# EAGLE board WWIII (EAGLE 8.4.3)
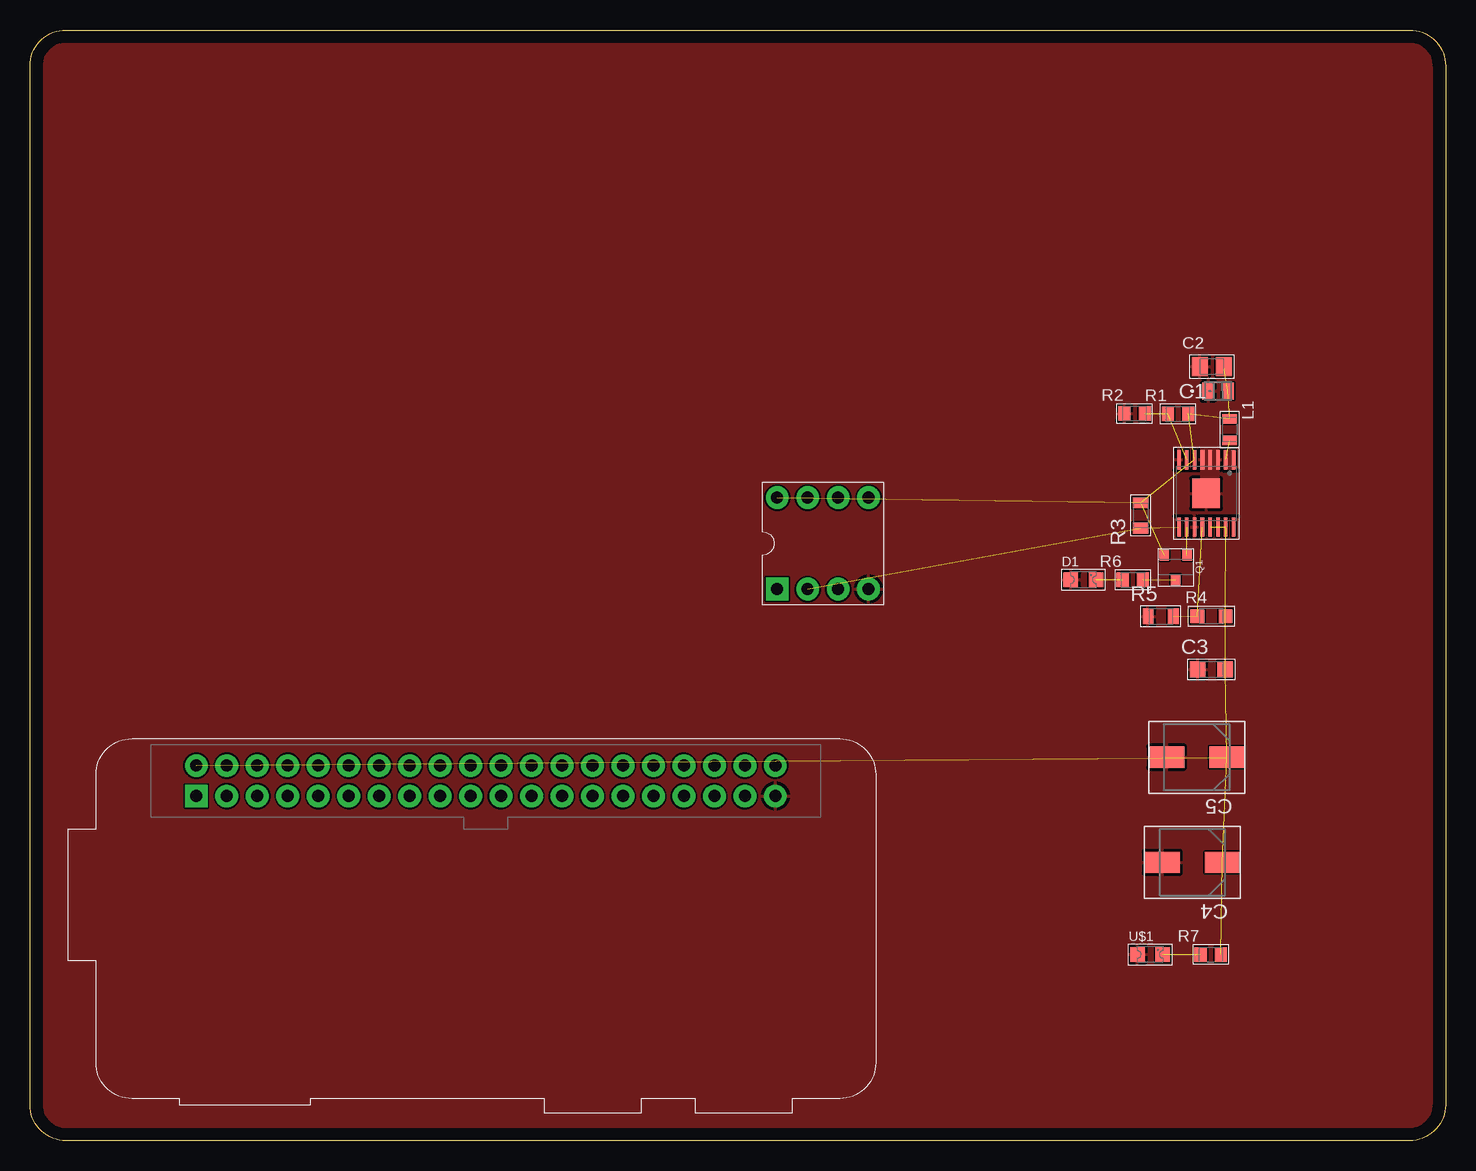
[diagram p0: board, top side]

Size 118 x 92.6 mm. Coordinates in mm from the lower left corner, seen from the top.
Outline: 118,3 arc-90 115,0 3,0 arc-90 0,3 0,89.6 arc-90 3,92.6 115,92.6 arc-90 118,89.6 118,3
Copper layers (1*16): Top 0.035mm / dielectric 1.5mm / Bottom 0.035mm
Design rules "default": minimum track width 6mil, minimum drill 0.35mm, track to track 6mil, track to pad 6mil, pad to pad 6mil, via to via 6mil, smd to smd 6mil, copper to edge 40mil, drill to drill 6mil, minimum pad ring 10mil, minimum via ring 8mil, stop-mask expansion 4mil, vias tented up to drill 0mil, thermal gap 10mil
tRestrict: 4 lines

## Footprints (pad centres in the part's own frame; a part is rotated, then mirrored left to right if it is on the bottom)
0805 = smd 0.965 x 1.448: 1 -0.826,0; 2 0.826,0
KEM_C1006_X5R_SMD = smd 1.35 x 1.55: 1 -1,0; 2 1,0
CAP-X5R = smd 1.3 x 1.3: 1 -1.15,0; 2 1.15,0
CAP_EEE_C = smd 2.921 x 1.778: 1 -2.502,0; 2 2.502,0
OSRAM_CHIPLED = smd 1.2 x 1.2: P$1 1.05,0; P$2 -1.05,0
MLZ2012 = smd 0.8 x 1.2: 1 -0.9,0; 2 0.9,0
SOT23-3 = smd 0.8 x 0.9: 1 -0.95,-1; 2 0.95,-1; 3 0,1.1
RC0805N = smd 1.016 x 1.194: 1 -0.851,0; 2 0.851,0
RESISTOR-0805 = smd 0.9 x 1.3: 1 -1.05,0; 2 1.05,0
PANASONIC-SMD-RESISTOR-0805 = smd 1.15 x 1.15: P$1 -1.175,0; P$2 1.175,0
TPS61030PWPR = smd 0.3 x 1.6: P$1 -2.275,-2.8; P$2 -1.625,-2.8; P$3 -0.975,-2.8; P$4 -0.325,-2.8; P$5 0.325,-2.8; P$6 0.975,-2.8; P$7 1.625,-2.8; P$8 2.275,-2.8; P$9 2.275,2.8; P$10 1.625,2.8; P$11 0.975,2.8; P$12 0.325,2.8; P$13 -0.325,2.8; P$14 -0.975,2.8; P$15 -1.625,2.8; P$16 -2.275,2.8 | smd 2.31 x 2.46: P$PWRPAD 0,0
RASPBERRY-PI = drill 1 pad 1.905 square: P$1 -24.13,-1.27 | drill 1 pad 1.905: P$2 -24.13,1.27; P$3 -21.59,-1.27; P$4 -21.59,1.27; P$5 -19.05,-1.27; P$6 -19.05,1.27; P$7 -16.51,-1.27; P$8 -16.51,1.27; P$9 -13.97,-1.27; P$10 -13.97,1.27; P$11 -11.43,-1.27; P$12 -11.43,1.27; P$13 -8.89,-1.27; P$14 -8.89,1.27; P$15 -6.35,-1.27; P$16 -6.35,1.27; P$17 -3.81,-1.27; P$18 -3.81,1.27; P$19 -1.27,-1.27; P$20 -1.27,1.27; P$21 1.27,-1.27; P$22 1.27,1.27; P$23 3.81,-1.27; P$24 3.81,1.27; P$25 6.35,-1.27; P$26 6.35,1.27; P$27 8.89,-1.27; P$28 8.89,1.27; P$29 11.43,-1.27; P$30 11.43,1.27; P$31 13.97,-1.27; P$32 13.97,1.27; P$33 16.51,-1.27; P$34 16.51,1.27; P$35 19.05,-1.27; P$36 19.05,1.27; P$37 21.59,-1.27; P$38 21.59,1.27; P$39 24.13,-1.27; P$40 24.13,1.27
ATTINY-SOCKETED = drill 1 pad 1.905 square: P$1 -3.81,-3.81 | drill 1 pad 1.905: P$2 -1.27,-3.81; P$3 1.27,-3.81; P$4 3.81,-3.81; P$5 3.81,3.81; P$6 1.27,3.81; P$7 -1.27,3.81; P$8 -3.81,3.81

## Placement (x,y rotation side)
C1  0.1uF  [0805]  99.04,62.5 0 top
C2  10uF  [KEM_C1006_X5R_SMD]  98.53,64.54 0 top
C3  2.2uF  [CAP-X5R]  98.49,39.29 0 top
C4  100uF  [CAP_EEE_C]  96.89,23.2 180 top
C5  100uF  [CAP_EEE_C]  97.26,31.97 180 top
D1  [OSRAM_CHIPLED]  87.81,46.77 0 top
L1  6.8uH  [MLZ2012]  100,59.29 270 top
Q1  [SOT23-3]  95.5,47.84 180 top
R1  1.87M  [RC0805N]  95.7,60.6 0 top
R2  340k  [RC0805N]  92.08,60.63 0 top
R3  200k  [RESISTOR-0805]  92.59,52.14 90 top
R4  1.87M  [PANASONIC-SMD-RESISTOR-0805]  98.49,43.73 0 top
R5  200k  [RESISTOR-0805]  94.25,43.71 0 top
R6  [RC0805N]  91.93,46.77 0 top
R7  [RC0805N]  98.43,15.53 0 top
U1  [TPS61030PWPR]  98.05,53.97 180 top
U2  [RASPBERRY-PI]  38,30 0 top
U3  [ATTINY-SOCKETED]  66.1,49.8 0 top
U$1  OSRAM-GREEN-DIFFUSED-LED  [OSRAM_CHIPLED]  93.38,15.53 0 top

## Library data of the parts
C1 = balogh; MANUFACTURER_PART_NUMBER: 08055C104KAT2A; VENDOR: AVX Corporation
C2 C3 D1 L1 Q1 R3-R5 U1-U3 U$1 = balogh
C4 C5 = balogh; MANUFACTURER_PART_NUMBER: EEE1AA101WR; VENDOR: Panasonic
R1 R2 R6 R7 = balogh; MANUFACTURER_PART_NUMBER: RC0805JR0710KL; VENDOR: Yageo

## Nets
GND: C1.1 C2.1 C3.1 C4.2 C5.2 D1.P$2 R2.1 R5.1 U1.P$3 U1.P$4 U1.P$5 U1.P$8 U1.P$11 U1.P$PWRPAD U2.P$39 U3.P$4 U$1.P$2
N$1: R4.P$1 R5.2 U1.P$12
N$2: L1.2 U1.P$1 U1.P$2
N$3: C3.2 C4.1 C5.1 R4.P$2 R7.2 U1.P$13 U1.P$14 U1.P$15 U2.P$2
N$4: R7.1 U$1.P$1
N$5: R1.1 R2.2 U1.P$7
N$6: Q1.1 U1.P$10
N$7: R3.1 U1.P$9 U3.P$2
N$8: Q1.3 R6.2
N$9: D1.P$1 R6.1
V+: C1.2 C2.2 L1.1 Q1.2 R1.2 R3.2 U1.P$6 U3.P$8

## Tracks (layer width: path | path; a pad name or v marks a point on that pad's centre or on a via)
GND
  pour Top (isolate 0.1): 0,0 118,0 118,93 0,93
  pour Top: 97.54,57.66 99.31,57.66 99.31,55.12 97.54,55.12
  pour Top (no thermals): 97.66,57.91 99.06,57.91 99.06,55.12 97.66,55.12
N$1  (2 unrouted)
N$2  (1 unrouted)
  Top 0.152: U1.P$2 99.7,56.77 99.68,56.79
  pour Top (no thermals): 99.57,57.53 100.46,57.53 100.46,56.01 99.57,56.01
N$3  (8 unrouted)
N$4  (1 unrouted)
N$5  (2 unrouted)
N$6  (1 unrouted)
N$7  (2 unrouted)
N$8  (1 unrouted)
N$9  (1 unrouted)
V+  (7 unrouted)